# EAGLE board Wheatstone (EAGLE 9.6.2)
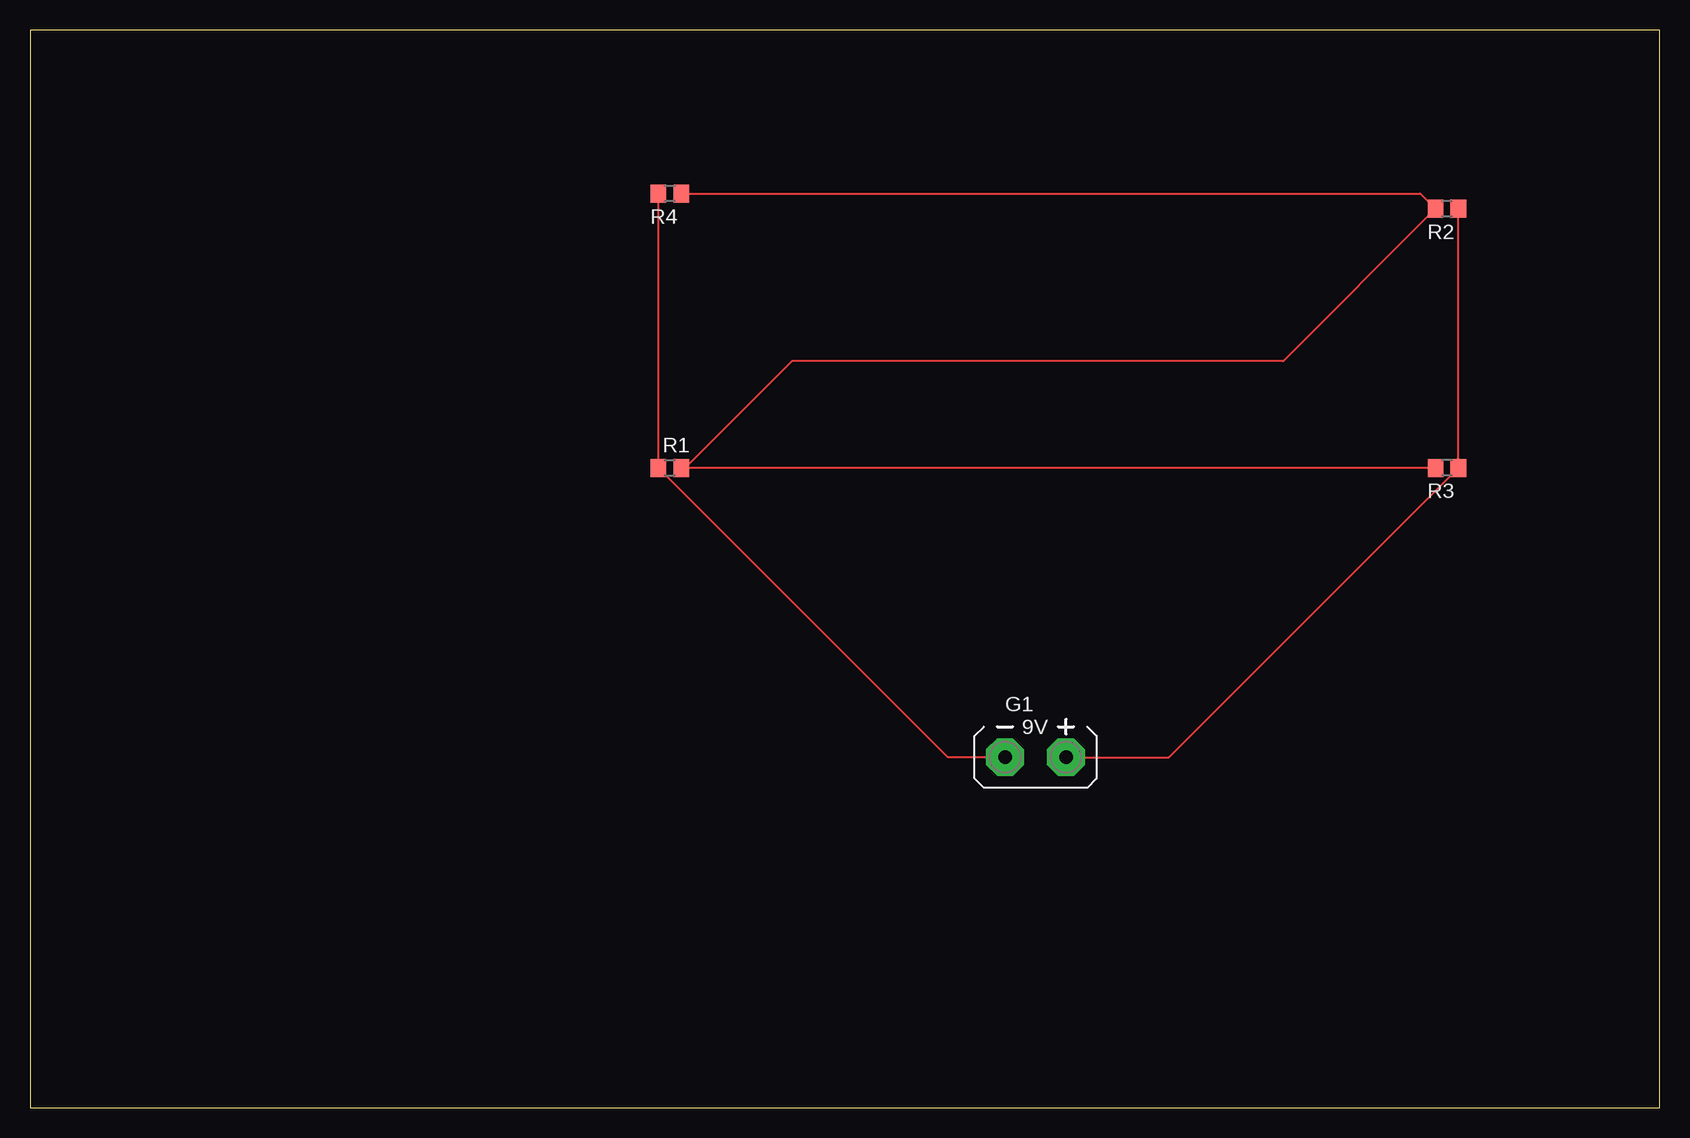
[diagram p0: board, top side]

Size 135.87 x 89.84 mm. Coordinates in mm from the lower left corner, seen from the top.
Outline: 0,0 135.87,0 135.87,89.84 0,89.84 0,0
Copper layers (1*16): Top 0.035mm / dielectric 1.5mm / Bottom 0.035mm
Design rules "default": minimum track width 6mil, minimum drill 0.35mm, track to track 6mil, track to pad 6mil, pad to pad 6mil, via to via 6mil, smd to smd 6mil, copper to edge 40mil, drill to drill 6mil, minimum pad ring 10mil, minimum via ring 8mil, stop-mask expansion 4mil, vias tented up to drill 0mil, thermal gap 10mil

## Footprints (pad centres in the part's own frame; a part is rotated, then mirrored left to right if it is on the bottom)
AB9V = drill 1.118 pad 3.15 octagon: + 0,2.54; - 0,-2.54
R0805 = smd 1.3 x 1.5: 1 -0.95,0; 2 0.95,0

## Placement (x,y rotation side)
G1  AB9V  [AB9V]  83.82,29.21 270 top
R1  [R0805]  53.34,53.34 0 top
R2  [R0805]  118.11,74.93 180 top
R3  [R0805]  118.11,53.34 180 top
R4  [R0805]  53.34,76.2 180 top

## Library data of the parts
G1 = battery
R1-R4 = rcl; SPICEPREFIX: R

## Nets
N$1: G1.+ R2.1 R3.1
N$2: R1.2 R2.2 R3.2 R4.1
N$3: G1.- R1.1 R4.2

## Tracks (layer width: path | path; a pad name or v marks a point on that pad's centre or on a via)
N$1
  Top 0.152: G1.+ 94.93,29.21 R3.1 R2.1
N$2
  Top 0.152: R4.1 115.89,76.2 R2.2 104.46,62.23 63.5,62.23 54.61,53.34 | R3.2 54.61,53.34 | 54.61,53.34 R1.2
N$3
  Top 0.152: G1.- 76.52,29.21 R1.1 R4.2